# EAGLE board IR_module_V0_3 (EAGLE 7.2.0)
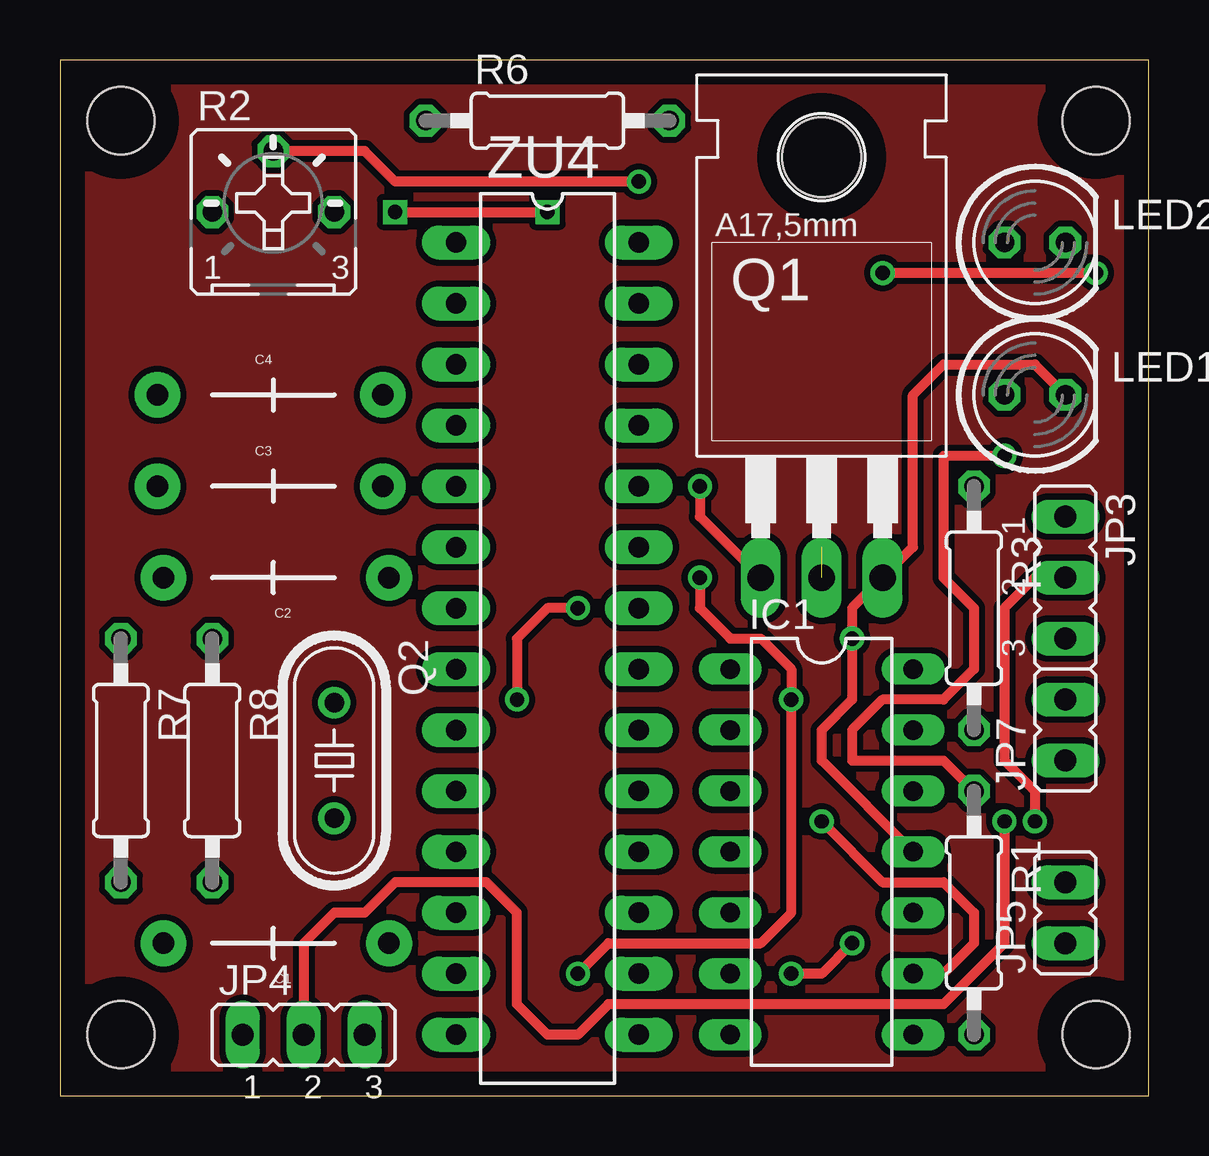
[diagram p0: board, top side]
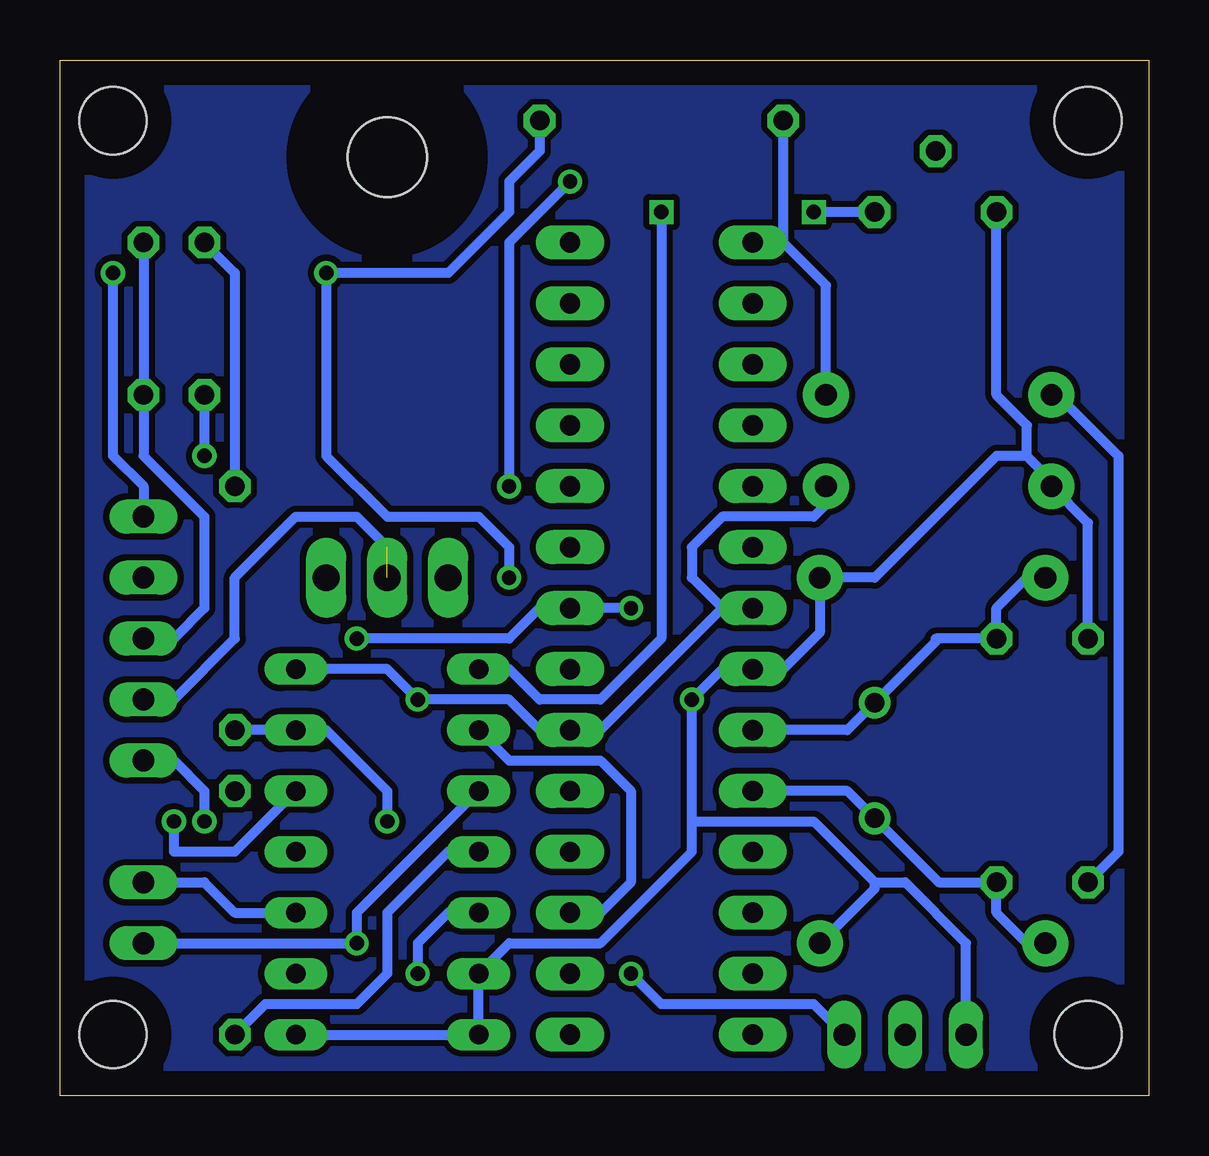
[diagram p1: board, bottom side, seen from below]

Size 45.39 x 43.17 mm. Coordinates in mm from the lower left corner, seen from the top.
Outline: 0,0 45.39,0 45.39,43.17 0,43.17 0,0
Copper layers (1*16): Top 0.035mm / dielectric 1.5mm / Bottom 0.035mm
Design rules "default": minimum track width 10mil, minimum drill 24mil, track to track 8mil, track to pad 8mil, pad to pad 8mil, via to via 8mil, smd to smd 8mil, copper to edge 40mil, drill to drill 8mil, minimum pad ring 10mil, minimum via ring 8mil, stop-mask expansion 4mil, vias tented up to drill 0mil, thermal gap 10mil
Net classes: 0 default: width 0.254 mm, clearance 0.254 mm; 1 power: width 0.61 mm, drill 0.61 mm, clearance 0.254 mm; 2 gnd: width 0.305 mm, drill 0.559 mm, clearance 0.254 mm; 3 usbvcc: width 0.508 mm, drill 0.61 mm, clearance 0.254 mm; 4 aref: width 0.406 mm, drill 0.61 mm, clearance 0.254 mm
Holes 2.8 mm at 2.54,40.64 43.18,2.54 2.54,2.54 43.18,40.64

## Footprints (pad centres in the part's own frame; a part is rotated, then mirrored left to right if it is on the bottom)
CAP-PTH-LARGE = drill 0.9 pad 1.905: 1 -4.826,0; 2 4.572,0
DIL14 = drill 0.813 long: 1 -7.62,-3.81; 2 -5.08,-3.81; 3 -2.54,-3.81; 4 0,-3.81; 5 2.54,-3.81; 6 5.08,-3.81; 7 7.62,-3.81; 8 7.62,3.81; 9 5.08,3.81; 10 2.54,3.81; 11 0,3.81; 12 -2.54,3.81; 13 -5.08,3.81; 14 -7.62,3.81
JP2 = drill 0.914 long: 1 -2.54,0; 2 0,0; 3 2.54,0
JP1 = drill 0.914 long: 1 0,-1.27; 2 0,1.27
LED5MM = drill 0.813 octagon: A -1.27,0; K 1.27,0
TO220 = drill 1.118 long: 1 -2.54,-6.35; 2 0,-6.35; 3 2.54,-6.35 | hole 3.302: 0,11.176
HC49/S = drill 0.813: 1 -2.413,0; 2 2.413,0
0207/10 = drill 0.813 octagon: 1 -5.08,0; 2 5.08,0
B25P = drill 0.813 octagon: A -2.54,0; E 2.54,0; S 0,2.54
DIL28-3 = drill 0.85 pad 1.422 long: 1 -16.51,-3.81; 2 -13.97,-3.81; 3 -11.43,-3.81; 4 -8.89,-3.81; 5 -6.35,-3.81; 6 -3.81,-3.81; 7 -1.27,-3.81; 8 1.27,-3.81; 9 3.81,-3.81; 10 6.35,-3.81; 11 8.89,-3.81; 12 11.43,-3.81; 13 13.97,-3.81; 14 16.51,-3.81; 15 16.51,3.81; 16 13.97,3.81; 17 11.43,3.81; 18 8.89,3.81; 19 6.35,3.81; 20 3.81,3.81; 21 1.27,3.81; 22 -1.27,3.81; 23 -3.81,3.81; 24 -6.35,3.81; 25 -8.89,3.81; 26 -11.43,3.81; 27 -13.97,3.81; 28 -16.51,3.81

## Placement (x,y rotation side)
C1  22p  [CAP-PTH-LARGE]  8.89,6.35 180 top
C2  22p  [CAP-PTH-LARGE]  8.89,21.59 180 top
C3  100n  [CAP-PTH-LARGE]  8.89,25.4 0 top
C4  100n  [CAP-PTH-LARGE]  8.89,29.21 0 top
IC1  74HCT02N  [DIL14]  31.75,10.16 270 top
JP3  [JP2]  41.91,21.59 270 top
JP4  [JP2]  10.16,2.54 0 top
JP5  [JP1]  41.91,7.62 0 top
JP7  [JP1]  41.91,15.24 0 top
LED1  [LED5MM]  40.64,29.21 0 top
LED2  [LED5MM]  40.64,35.56 0 top
Q1  IRF540  [TO220]  31.75,27.94 0 top
Q2  16M  [HC49/S]  11.43,13.97 270 top
R1  220  [0207/10]  38.1,7.62 270 top
R2  [B25P]  8.89,36.83 0 top
R3  220  [0207/10]  38.1,20.32 270 top
R6  10K  [0207/10]  20.32,40.64 0 top
R7  1K  [0207/10]  2.54,13.97 270 top
R8  1M  [0207/10]  6.35,13.97 270 top
ZU4  ATMEGA328P-PU  [DIL28-3]  20.32,19.05 270 top

## Library data of the parts
C1-C4 = SparkFun-Passives
IC1 = 74xx-eu
JP3-JP5 JP7 = jumper
LED1 LED2 = led
Q1 = transistor-fet
Q2 = crystal; OC_FARNELL: 1667008; OC_NEWARK: unknown
R1 R3 R6-R8 = rcl
R2 = pot
ZU4 = SmartPrj

## Nets
12V: JP4.2 JP7.1
38KHZ: IC1.2 ZU4.17
GND [gnd]: C1.1 C2.1 C3.1 IC1.6 IC1.7 IC1.8 IC1.11 JP3.3 JP4.1 LED1.K LED2.K Q1.3 R2.A R7.1 ZU4.8 ZU4.22
IR_RX: IC1.12 JP3.2
MOSFET_GATE: Q1.1 R2.S
MOSFET_OUT: IC1.1 R2.E
N$2: IC1.4 R1.2
N$3: LED1.A R1.1
N$4: IC1.9 IC1.13 R3.2
N$5: LED2.A R3.1
N$8: JP7.2 Q1.2
N$9: C4.1 R7.2
RESET: C4.2 R6.1 ZU4.1
RX: IC1.3 IC1.5 JP5.1
TX: IC1.10 JP5.2
VCC: C3.2 IC1.14 JP3.1 JP4.3 R6.2 ZU4.7 ZU4.20
XTAL1: C2.2 Q2.1 R8.1 ZU4.9
XTAL2: C1.2 Q2.2 R8.2 ZU4.10

## Tracks (layer width: path | path; a pad name or v marks a point on that pad's centre or on a via)
12V  (via drill 0.6)
  Top 0.406: v39.37,11.43 39.37,6.35 36.83,3.81 22.86,3.81 21.59,2.54 20.32,2.54 19.05,3.81 19.05,7.62 17.78,8.89 13.97,8.89 12.7,7.62 11.43,7.62 10.16,6.35 JP4.2
  Bottom 0.406: JP7.1 40.64,13.97 39.37,12.7 v39.37,11.43
38KHZ
  Bottom 0.406: IC1.2 26.67,13.97 22.86,13.97 21.59,12.7 21.59,8.89 22.86,7.62 ZU4.17
GND  (via drill 0.6)
  Top 0.406: IC1.11 31.75,13.97 31.75,15.24 33.02,16.51 v33.02,19.05 33.02,20.32 Q1.3 35.56,22.86 35.56,29.21 36.83,30.48 40.64,30.48 LED1.K | v21.59,20.32 20.32,20.32 19.05,19.05 v19.05,16.51
  Bottom 0.406: JP4.1 7.62,6.35 10.16,8.89 11.43,8.89 | R7.1 2.54,23.88 C3.1 4.06,25.65 5.08,26.67 | 5.08,26.67 5.08,27.94 6.35,29.21 R2.A | 5.08,26.67 6.35,26.67 11.43,21.59 C2.1 13.72,19.3 15.24,17.78 ZU4.8 17.78,17.78 v19.05,16.51 19.05,11.43 | LED2.K LED1.K 41.91,26.67 39.37,24.13 39.37,20.32 40.64,19.05 JP3.3 | v21.59,20.32 ZU4.22 25.4,20.32 26.67,19.05 v33.02,19.05 | IC1.8 IC1.7 IC1.6 26.67,6.35 22.86,6.35 19.05,10.16 19.05,11.43 | 19.05,11.43 13.97,11.43 11.43,8.89 | C1.1 11.43,8.64 11.43,8.89
IR_RX  (via drill 0.6)
  Top 0.406: v40.64,11.43 40.64,12.7 39.37,13.97 39.37,20.32 40.64,21.59 JP3.2
  Bottom 0.406: IC1.12 38.1,10.16 40.64,10.16 v40.64,11.43
MOSFET_GATE  (via drill 0.6)
  Top 0.406: v26.67,25.4 26.67,24.13 Q1.1 | v24.13,38.1 13.97,38.1 12.7,39.37 R2.S
  Bottom 0.406: v26.67,25.4 26.67,35.56 v24.13,38.1
MOSFET_OUT  (via drill 0.6)
  Top 0.406: v13.97,36.83 v20.32,36.83
  Bottom 0.406: R2.E v13.97,36.83 | v20.32,36.83 20.32,19.05 22.86,16.51 25.4,16.51 26.67,17.78 IC1.1
N$1
  pour Bottom: 0,43.18 45.72,43.18 45.72,0 0,0
N$2
  Bottom 0.406: IC1.4 29.21,10.16 31.75,7.62 31.75,5.08 33.02,3.81 36.83,3.81 R1.2
N$3  (via drill 0.6)
  Top 0.406: v39.37,26.67 36.83,26.67 36.83,21.59 38.1,20.32 38.1,17.78 36.83,16.51 34.29,16.51 33.02,15.24 33.02,13.97 36.83,13.97 R1.1
  Bottom 0.406: LED1.A v39.37,26.67
N$4  (via drill 0.6)
  Top 0.406: IC1.9 36.83,5.08 38.1,6.35 38.1,7.62 36.83,8.89 34.29,8.89 v31.75,11.43
  Bottom 0.406: R3.2 IC1.13 34.29,15.24 31.75,12.7 v31.75,11.43
N$5
  Bottom 0.406: LED2.A 38.1,34.29 R3.1
N$6
  pour Top: 0,43.18 45.72,43.18 45.72,0 0,0
N$8  (1 unrouted)
  Bottom 0.406: JP7.2 40.64,16.51 38.1,19.05 38.1,21.59 35.56,24.13 33.02,24.13 31.75,22.86
N$9
  Bottom 0.406: R7.2 1.27,10.16 1.27,26.67 3.81,29.21 C4.1
RESET
  Bottom 0.406: C4.2 13.46,33.78 15.24,35.56 | 15.24,35.56 ZU4.1 | 15.24,35.56 R6.1
RX  (via drill 0.6)
  Top 0.406: v30.48,5.08 31.75,5.08 v33.02,6.35
  Bottom 0.406: JP5.1 v33.02,6.35 33.02,7.62 IC1.3 | v30.48,5.08 30.48,6.35 29.21,7.62 IC1.5
TX
  Bottom 0.406: JP5.2 39.37,8.89 38.1,7.62 IC1.10
VCC  (via drill 0.6)
  Top 0.406: v21.59,5.08 22.86,6.35 29.21,6.35 30.48,7.62 v30.48,16.51 30.48,17.78 29.21,19.05 27.94,19.05 26.67,20.32 v26.67,21.59 | v43.18,34.29 v34.29,34.29
  Bottom 0.406: R6.2 25.4,39.37 26.67,38.1 26.67,36.83 29.21,34.29 v34.29,34.29 34.29,26.67 31.75,24.13 27.94,24.13 26.67,22.86 v26.67,21.59 | 34.29,17.78 IC1.14 31.75,17.78 v30.48,16.51 26.67,16.51 25.4,15.24 ZU4.20 22.86,15.24 17.78,20.32 | JP4.3 13.97,3.81 20.32,3.81 v21.59,5.08 | v43.18,34.29 43.18,26.67 41.91,25.4 JP3.1 | C3.2 13.46,24.64 13.97,24.13 17.78,24.13 19.05,22.86 19.05,21.59 17.78,20.32 | ZU4.7 17.78,20.32
XTAL1
  Bottom 0.406: ZU4.9 12.57,15.24 Q2.1 8.89,18.92 8.89,19.05 R8.1 6.35,20.32 5.08,21.59 C2.2
XTAL2
  Bottom 0.406: ZU4.10 12.57,12.7 Q2.2 8.76,8.89 R8.2 6.35,7.62 5.08,6.35 C1.2